# Altium PCB CMSIS-DAP_11U37_V100.PcbDoc
Units mil, origin at the board's own origin, x right, y up, seen from the top; angles counter-clockwise.
Board outline 1968.62 x 1220.51 mil, 2 copper layers (Top Layer, Bottom Layer); 29 components, 25 nets, 140 pads, 35 vias.
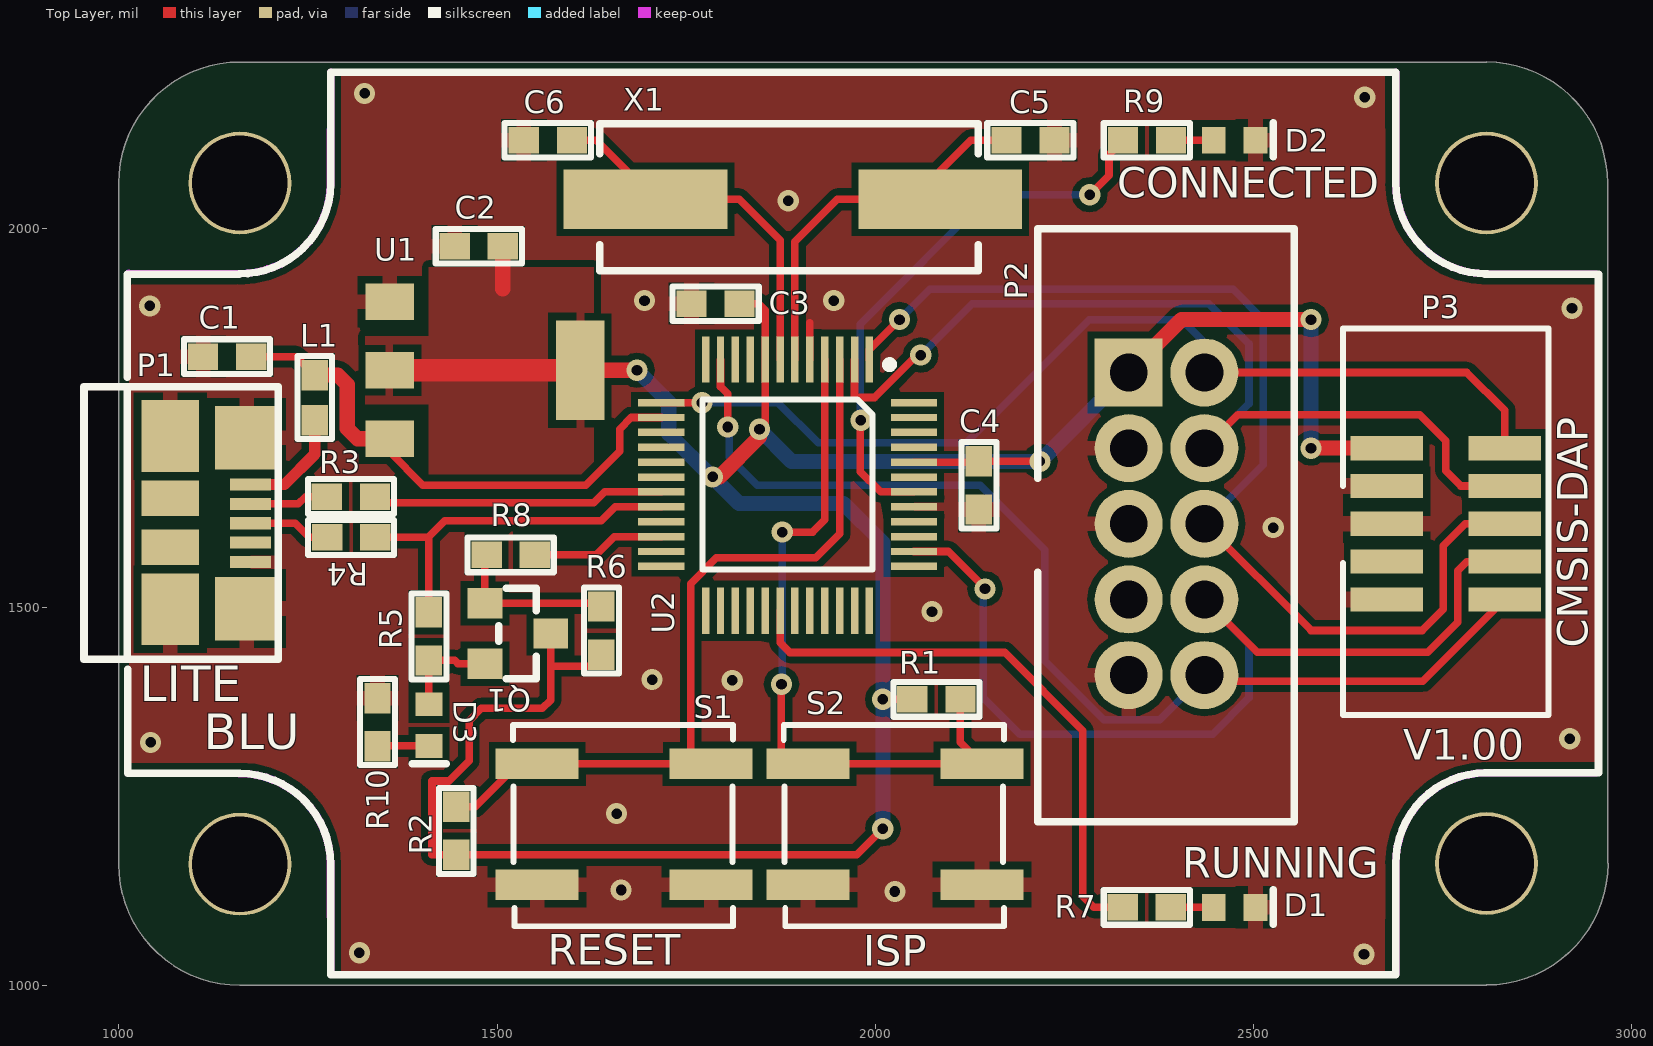
[diagram p0: Top Layer view]
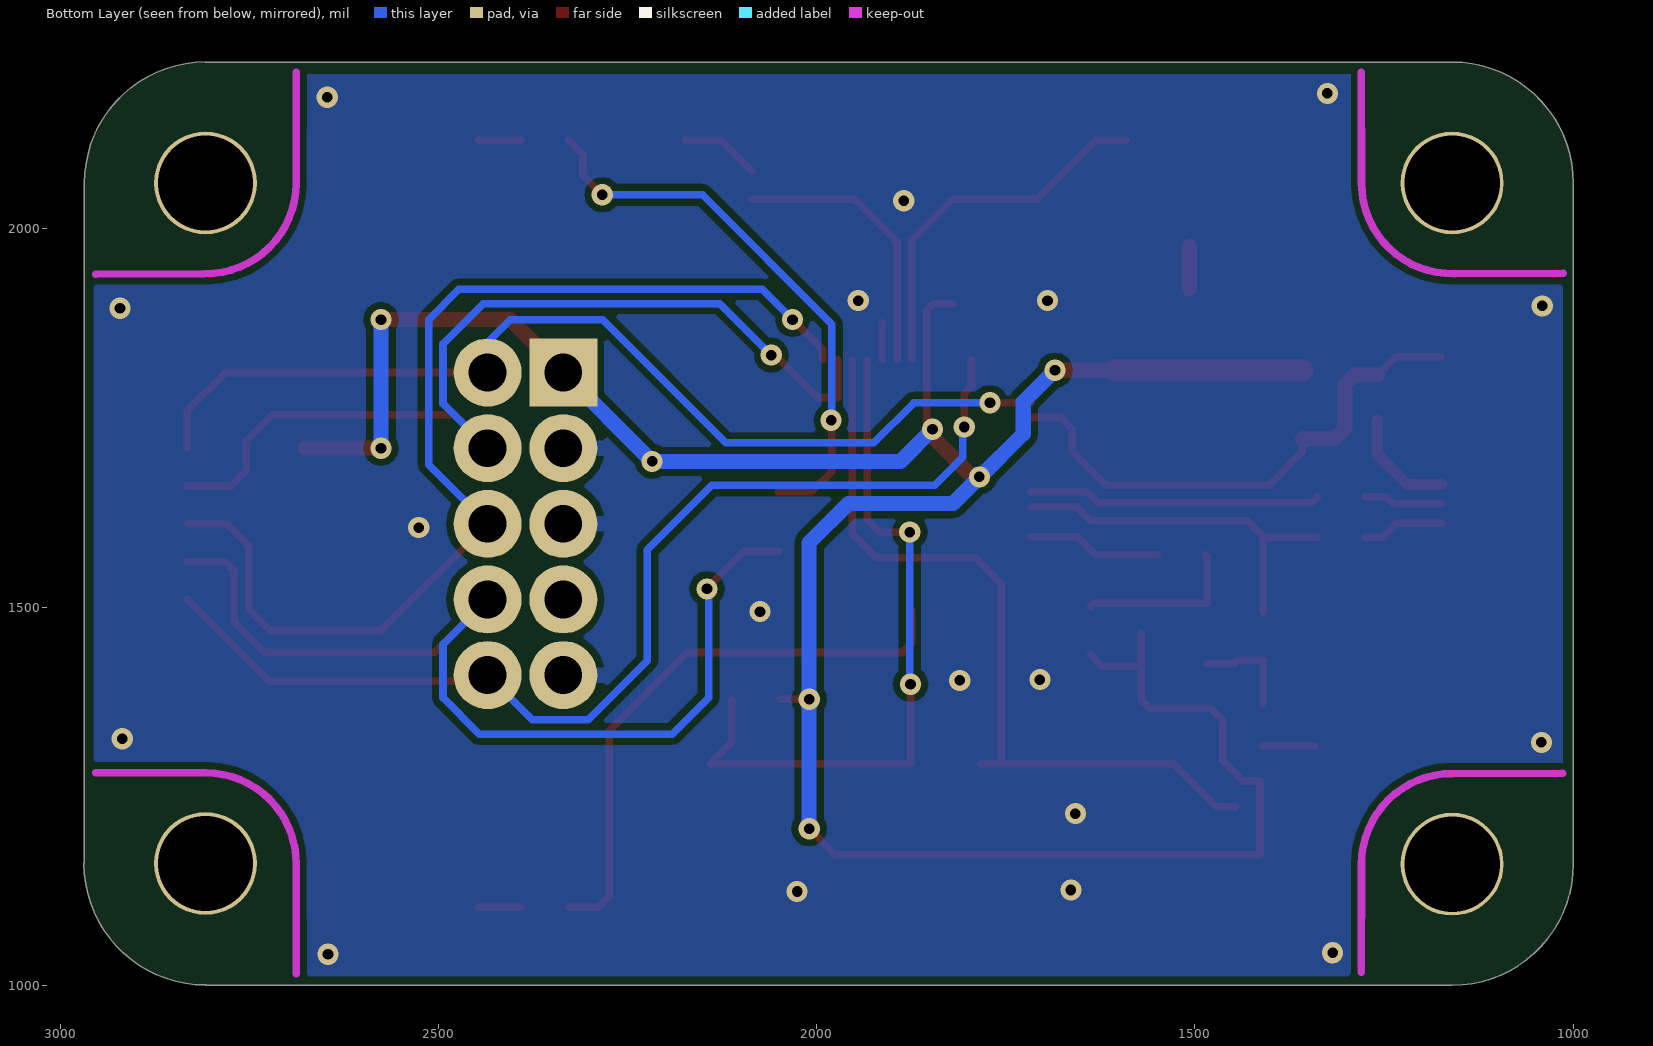
[diagram p1: Bottom Layer view, seen from below]
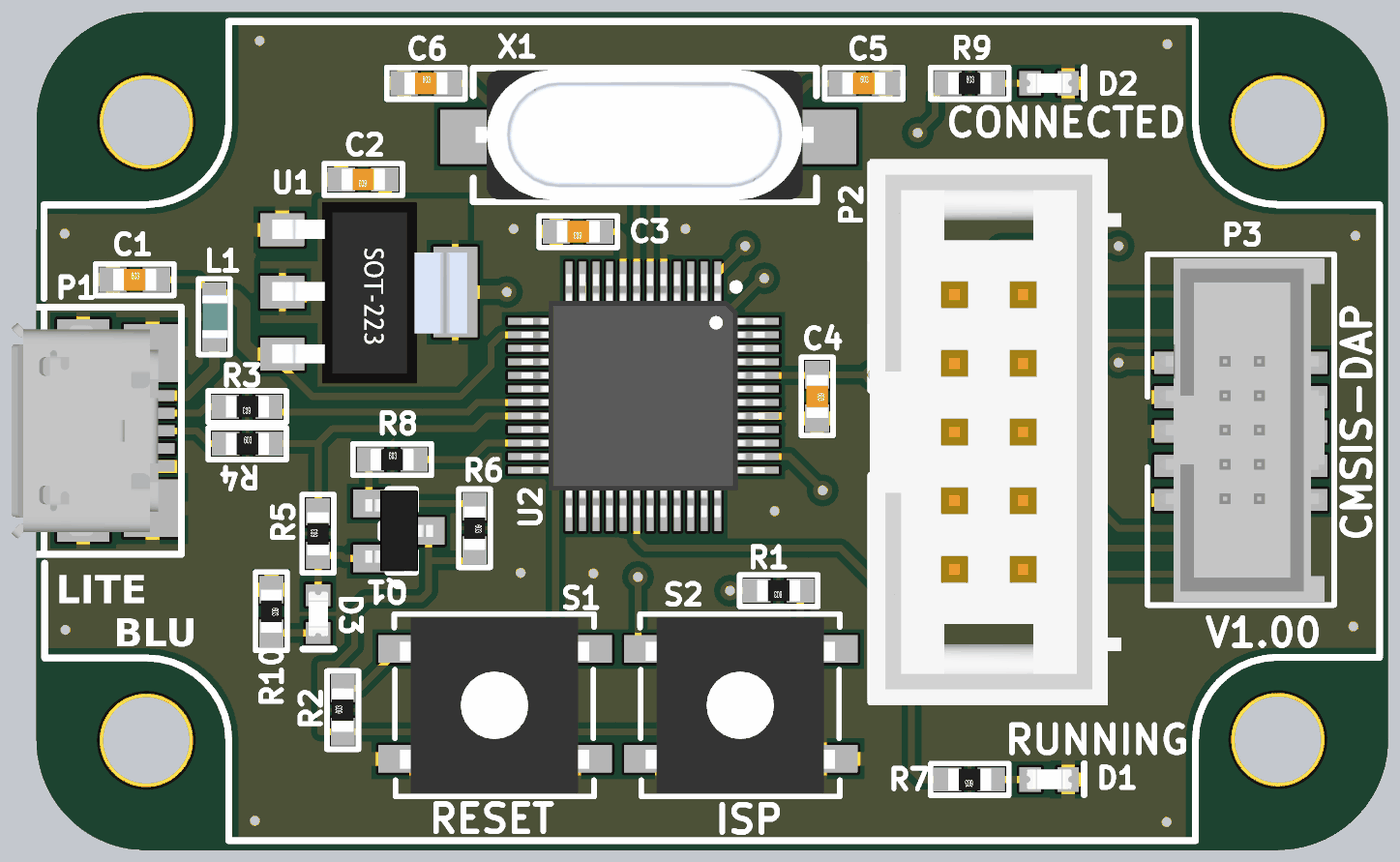
[diagram p2: 3D render of the assembled board from above, using the file's embedded part models]

## Layer stack, top to bottom
Top Layer: signal copper 1.4
Dielectric: dielectric 12.6, FR-4, Dk 4.8
Bottom Layer: signal copper 1.4

## Board outline
1160,999.99 cw(c1160,1160) 999.99,1160 1000,1160 1000,2060 cw(c1160,2060.47) 1160,2220.47 2808,2220.47 2808,2220.5 cw(c2808,2060.47) 2968.03,2060 2968.5,2060 2968.5,1161 2968.61,1161 cw(c2808,1161) 2808,1000.39 2808,1000

## Design rules (kind name [scope] priority, off if disabled: settings)
Clearance [All] p1: gap=9
HoleSize [All] p1: absolutevalues=TRUE maxlimit=200 minlimit=15 maxpercent=80.000 minpercent=20.000
PolygonConnect [All vs isVia] p1: connectstyle=Direct reliefconductorwidth=10 reliefentries=2 polygonreliefangle="45 Angle" airgapwidth=10
PolygonConnect PolygonConnect_1 [All] p2: connectstyle=Relief reliefconductorwidth=20 reliefentries=4 polygonreliefangle="90 Angle" airgapwidth=10
RoutingVias [All] p1: holewidth=15 width=30 viastyle="Through Hole" minholewidth=15 minwidth=30 maxholewidth=30 maxwidth=50
SilkscreenOverComponentPads [All] p1: minsilkscreentomaskgap=4
SolderMaskExpansion [All] p1: expansion=4
Width [All] p1: maxlimit=100 minlimit=10 preferedwidth=20
26 further rules are at their usual default settings.

## Components (designator, comment, footprint, x,y, rotation, side; value= is the part's Value field where it differs from the comment)
C1 "100n" "CAP 0603" 1112,1831 r0 top
C2 "100n" "CAP 0603" 1507,1977 r180 top
C3 "100n" "CAP 0603" 1820,1901 r180 top
C4 "100n" "CAP 0603" 2137,1692 r270 top
C5 "27p" "CAP 0603" 2174,2117 r0 top
C6 "27p" "CAP 0603" 1536,2117 r0 top
D1 "LED" "LED 0603" 2475,1103 r0 top
D2 "LED" "LED 0603" 2475,2117 r0 top
D3 "LED" "LED 0603" 1410,1344 r270 top
L1 "Ferrite Bead" "IND 0603" 1259,1805 r270 top
P1 "USB MICRO-B" "USB - MICRO-B SMD" 1174,1662 r0 top
P2 "JTAG/SWD 2.54mm" "Header IDC Box 10w 2.54mm" 2335,1810 r0 top
P3 "JTAG/SWD 1.27mm" "Header 10W /2 1.27mm Shrouded" 2676,1710 r270 top
Q1 "BC807" SOT-23 1484,1505 r270 top
R1 "10k" "RES 0603" 2112,1378 r180 top
R2 "10k" "RES 0603" 1446,1173 r90 top
R3 "33R" "RES 0603" 1338,1646 r180 top
R4 "33R" "RES 0603" 1276,1592 r0 top
R5 "1k5" "RES 0603" 1410,1430 r90 top
R6 "10k" "RES 0603" 1638,1500 r270 top
R7 "470R" "RES 0603" 2390,1103 r180 top
R8 "2k2" "RES 0603" 1487,1569 r0 top
R9 "470R" "RES 0603" 2328,2117 r0 top
R10 "470R" "RES 0603" 1342,1379 r270 top
S1 "PB" "Push Button Omron SPST" 1783,1133 r180 top
S2 "PB" "Push Button Omron SPST" 2141,1133 r180 top
U1 "{Value}" SOT-223 1610,1813 r270 top
U2 "LQFP_1" LQFP-48 1884,1662 r270 top
X1 "12MHz" "Crystal SMU4" 1891,2039 r0 top

## Footprints (in the part's own frame and the unit in brackets; to place one, negate y for a bottom-side part, rotate by r counter-clockwise, add the part's x,y. Pads: shape width x height; smd on the part's side, far side on the other; paste and mask are expansions set on the pad)
"CAP 0603" [mil] "SMD Capacitor 0603"
  rect 40x35 smd: 1(-0.56,0) 2(63,0)
  silkscreen extent -26,-23 88,23, body extent 0,-16 63,16, height 12
"Crystal SMU4" [mm] "SMU4"
  rect 5.5x2 smd: 1(-4.95,0) 2(4.95,0)
  silkscreen extent -6.48,-2.4 6.22,2.54, body extent -6.39,-2.32 6.11,2.48, height 3.92
"Header 10W /2 1.27mm Shrouded" [mil] "Header 10W /2 1.27mm Shrouded"
  rect 32x96 smd: 1(0,0) 2(0,156) 3(50,0) 4(50,156) 5(100,0) 6(100,156) 7(150,0) 8(150,156) 9(200,0) 10(200,156)
  silkscreen extent -158,-58 353,214, body extent -152,-40 348,200, height 215
"Header IDC Box 10w 2.54mm" [mil] "IDC Box Header 10w 2.54mm"
  rect 90x90 hole 50: 1(0,0)
  round 90 hole 50: 2(100,0) 3(0,-100) 4(100,-100) 5(0,-200) 6(100,-200) 7(0,-300) 8(100,-300) 9(0,-400) 10(100,-400)
  silkscreen extent -120,-594 219,190, body extent -125,-599 245,197, height 366
"IND 0603" [mil] "SMD Inductor 0603"
  rect 40x35 smd: 1(-1.56,0) 2(58,0)
  silkscreen extent -27,-23 83,23, body extent -3,-18 59,19, height 31
"LED 0603" [mm] "SMD LED 0603"
  rect 0.8x0.9 smd: 1(-0.7,0) 2(0.7,0)
  silkscreen extent 1.3,-0.56 1.3,0.58, body extent -0.83,-0.36 0.83,0.37, height 0.68
LQFP-48 [mm] "Thin QFP, 48-Leads, Body 7x7mm, Pitch 0.5mm, IPC High Density"
  rect 1.55x0.25 smd: 1(-4.191,2.75) 2(-4.191,2.25) 3(-4.191,1.75) 4(-4.191,1.25) 5(-4.191,0.75) 6(-4.191,0.25) 7(-4.191,-0.25) 8(-4.191,-0.75) 9(-4.191,-1.25) 10(-4.191,-1.75) 11(-4.191,-2.25) 12(-4.191,-2.75) 25(4.242,-2.75) 26(4.242,-2.25) 27(4.242,-1.75) 28(4.242,-1.25) 29(4.242,-0.75) 30(4.242,-0.25) 31(4.242,0.25) 32(4.242,0.75) 33(4.242,1.25) 34(4.242,1.75) 35(4.242,2.25) 36(4.242,2.75)
  rect 0.25x1.55 smd: 13(-2.75,-4.242) 14(-2.25,-4.242) 15(-1.75,-4.242) 16(-1.25,-4.242) 17(-0.75,-4.242) 18(-0.25,-4.242) 19(0.25,-4.242) 20(0.75,-4.242) 21(1.25,-4.242) 22(1.75,-4.242) 23(2.25,-4.242) 24(2.75,-4.242) 37(2.75,4.242) 38(2.25,4.242) 39(1.75,4.242) 40(1.25,4.242) 41(0.75,4.242) 42(0.25,4.242) 43(-0.25,4.242) 44(-0.75,4.242) 45(-1.25,4.242) 46(-1.75,4.242) 47(-2.25,4.242) 48(-2.75,4.242)
  silkscreen extent -4.15,-2.85 2.85,3.55, body extent -4.5,-4.51 4.5,4.49, height 1.56
"Push Button Omron SPST" [mil]
  rect 110x40 smd: 1(0,0) 1(230,0) 2(0,-160) 2(230,-160)
  silkscreen extent -29,-211 262,55, body extent -22,-206 254,50, height 134
"RES 0603" [mil] "SMD Resistor 0603"
  rect 40x35 smd: 1(-0.56,0) 2(63,0)
  silkscreen extent -26,-23 88,23, body extent 0,-16 63,16, height 12
SOT-23 [mil]
  rect 40x46 smd: 1(0,0) 2(80,0) 3(40,87)
  silkscreen extent -20,18 100,68, body extent -19,-5 99,93, height 42
SOT-223 [mil]
  rect 48x64 smd: 1(-90.55,-252) 2(0,-252) 3(90.55,-252)
  rect 132x64 smd: 2(0,0)
  body extent -131,-267 133,17, height 73
"USB - MICRO-B SMD" [mil] "USB MICRO-B Molex (702-5475)"
  rect 54x16 smd: 1(0,0) 2(0,-25.59) 3(0,-51.18) 4(0,-76.77) 5(0,-102.36)
  rect 76x95 smd: 6(-106,-165) 6(-106,64)
  rect 84x84 smd: 6(-5,-164) 6(-5,62)
  rect 76x47 smd: 7(-106,-83) 7(-106,-18)
  silkscreen extent -220,-231 37,129, body extent -210,-208 3,106, height 108

## Part data
C1 C2 C3 C4 C5 C6: library part "Capacitor Ceramic", "Capacitor Ceramic"
L1: library part Inductor, "Inductor"
P2 P3: library part "CONN - 10W JTAG/SWD", "CONN - 10W JTAG/SWD"
Q1: library part "Transistor PNP", "PNP Bipolar Transistor"
R1 R2 R3 R4 R5 R6 R7 R8 R9 R10: library part Resistor, "Resistor"
S1 S2: library part "Push Button SPST"
U1: library part "Regulator Positive", "Regulator Positive"
U2: library part LPC11Uxx-48, "32-bit ARM Cortex-M0 microcontroller; up to 128 kB flash; up  to 12 kB SRAM and 4 kB EEPROM; USB device; USART"
X1: library part Crystal

## Free pads (board coordinates)
  round 136 hole 126: 0(1160,1160) 0(1160,2060.47) 0(2808,1161) 0(2808,2060.47)

## Via types
v1: diameter 28, hole 14, Top Layer to Bottom Layer, tented both sides, 35 vias

## Nets (pads, with @x,y where several pads share a name; then routed paths per layer and width w, separated by ;. In a path a pad name is that pad's centre, name@x,y a point inside that pad or via, vN(x,y) a via of type N, cw(c..) or ccw(c..) an arc to the next point about the centre after c; other vN are vias at no path point)
3V3: C2.1 C3.1 C4.1 P2.1 P3.1 Q1.3 R1.2 R2.1 R6.2 U1.2 U2.8 U2.44 | length 3935.5
  Top Layer w10: R6.2 1623,1422 1571,1422 Q1.3 1571,1377 1560,1366 1479,1366 1463,1350 1463,1297 1436,1270 1414,1270 1414,1172.44 R2.1 1975.44,1172.44 v1(2010,1207) ; C3.1 1846,1901 1854.47,1892.53 U2.8 1854.47,1742.47 v1(1847,1735) ; v1(2010,1378) R1.2 ; U2.44 2135.97,1691.53 C4.1 v1(2217.56,1692.56)
  Top Layer w20: 1507.56,1920.56 C2.1 ; U1.2@1610,1813 v1(1685,1813) ; v1(1785,1672) 1794,1672 1847,1725 v1@1847,1733.33 ; P2.1 2405,1880 v1(2576,1880) ; v1(2576,1710) P3.1
  Top Layer w30: U1.2@1358,1813 U1.2@1605,1813
  Bottom Layer w20: v1(1685,1813) 1727,1771 1727,1729 1784,1672 v1(1785,1672) 1820,1637 1958,1637 2010,1585 v1(2010,1378) v1(2010,1207) ; v1(1847,1735) 1889.44,1692.56 v1(2217.56,1692.56) P2.1 ; v1(2576,1710) v1(2576,1880)
GND: C1.1 C2.2 C3.2 C4.2 C5.2 C6.1 D1.2 D2.2 P1.5 P1.6 P2.3 P2.5 P2.9 P3.3 P3.5 P3.9 R10.1 S1.1 S2.1 U1.1 U2.5 U2.41 | length 48.5
  Top Layer w10: U2.5 1913.53,1875.53
  other v1: 2646,1041 1318,1043 2026,1124 1664,1126 1658,1227 1042,1321 2918,1326 1811,1403 1705,1404 2075,1494 2526,1605 2921,1895 1041,1898 1695,1905 1945,1905 1885,2037 2647,2174 1325,2179
NetC5_1: C5.1 U2.6 X1.2 | length 475.3
  Top Layer w10: U2.6 1893.84,1982.84 1950,2039 X1.2 ; X1.2@2085.88,2076.88 2126,2117 C5.1
NetC6_2: C6.2 U2.7 X1.1 | length 495.7
  Top Layer w10: C6.2@1591,2117 1631,2117 1709,2039 1820,2039 1874.16,1984.84 U2.7
NetD1_1: D1.1 R7.1 | length 56.9
  Top Layer w10: R7.1 D1.1
NetD2_1: D2.1 R9.2 | length 56.4
  Top Layer w10: R9.2 D2.1
NetD3_1: D3.1 Q1.2 R5.1 | length 133.7
  Top Layer w10: D3.1 R5.1 1444,1429.44 1448.44,1425 Q1.2
NetD3_2: D3.2 R10.2 | length 68.2
  Top Layer w10: R10.2 1342.44,1316.44 D3.2
NetL1_2: L1.2 P1.1 | length 146.6
  Top Layer w15: P1.1 1219,1662 1259,1702 L1.2
NetP1_2: P1.2 R3.2 | length 105
  Top Layer w10: P1.2 1237.41,1636.41 1247,1646 R3.2
NetP1_3: P1.3 R4.1 | length 109.2
  Top Layer w10: P1.3 1233.18,1610.82 1252,1592 R4.1
NetQ1_1: Q1.1 R6.1 R8.1 | length 220.9
  Top Layer w10: R8.1 1484,1566.56 Q1.1 1633.56,1505 R6.1
NetR1_1: R1.1 S2.2 U2.4 | length 941.5
  Top Layer w10: v1(1876,1398) 1876,1293 1911,1293 2141,1293 2112.56,1321.44 R1.1 ; v1(1877,1599) 1917,1599 1933.21,1615.21 U2.4
  Bottom Layer w10: v1@1877,1399 v1(1877,1599)
NetR3_1: R3.1 U2.19 | length 387.6
  Top Layer w10: R3.1 1346.56,1638 1628,1638 1642.16,1652.16 U2.19
NetR4_2: R4.2 R5.2 U2.20 | length 564.8
  Top Layer w10: R5.2 1410,1592 R4.2 1409,1592 1431,1614 1638,1614 1656.47,1632.47 U2.20
NetR7_2: R7.2 U2.30 | length 768.2
  Top Layer w10: U2.30 1874.16,1452.84 1887.06,1439.94 2171.06,1439.94 2274.5,1336.5 2274.5,1117.5 2289,1103 R7.2
NetR9_1: R9.1 U2.42 | length 758
  Top Layer w10: v1@1980,1747 v1(1981,1747) ; v1@1980,1751 1982,1753 1981,1753 1980,1752 1980,1679.16 2007,1652.16 U2.42 ; v1(2283.44,2045) 2309,2070.56 2309,2098.56 R9.1
  Bottom Layer w10: v1(1981,1747) 1980,1747 1980,1751 1982,1753 1981,1753 1980,1752 1980,1874 2151,2045 v1(2283.44,2045)
NRESET: R2.2 S1.2 U2.3 | length 1052.9
  Top Layer w10: R2.2 1471,1236 1528,1293 1553,1293 S1.2@1756,1293 ; S1.2@1783,1293 S1.2@1756,1293 ; U2.3 1952.9,1596.9 1921,1565 1790,1565 1756,1531 S1.2@1756,1293
NRST: P2.10 P3.10 U2.11 | length 1474.2
  Top Layer w10: U2.11 1795.42,1791.45 1804.38,1782.49 1804.51,1782.49 1804.51,1782.35 1805,1781.87 v1(1805,1738) ; P2.10 P2.10@2459,1386 ; P2.10@2452,1402 2724,1402 P3.10
  Bottom Layer w10: v1@1807,1738 1807,1697.74 1843.74,1661 2139,1661 2224,1576 2224,1429 2302,1351 2376,1351 P2.10
TCK: P2.4 P3.4 U2.2 | length 1284.8
  Top Layer w10: U2.2 1972.58,1777 1999,1777 2055,1833 v1(2060,1833) ; P2.4 2479,1754 2720,1754 2754,1720 2754,1680 2774,1660 P3.4
  Bottom Layer w10: v1(2060,1833) 2128,1901 2441,1901 2494,1848 2494,1769 P2.4
TDI: P2.8 P3.8 U2.38 | length 1320.2
  Top Layer w10: U2.38 2096.58,1573.42 v1@2146,1524 ; P2.8 2505,1440 2730,1440 2770,1480 2770,1548 2782,1560 P3.8
  Bottom Layer w10: v1@2143,1524 2143,1380 2191,1332 2446,1332 2494,1380 2494,1451 P2.8
  other v1: 2145,1524
TDO: P2.6 P3.6 U2.1 | length 1448.9
  Top Layer w10: U2.1 1992.27,1840.27 v1(2032,1880) ; P2.6 2576,1469 2723,1469 2751,1497 2751,1581 2780,1610 P3.6
  Bottom Layer w10: v1(2032,1880) 2072,1920 2473,1920 2513,1880 2513,1688 P2.6
TMS: P2.2 P3.2 U2.13 | length 1339.9
  Top Layer w10: U2.13 1777,1770.27 1776.73,1770 v1(1771,1770) ; P2.2 2782,1810 2832,1760 P3.2
  Bottom Layer w10: v1(1771,1770) 1771.27,1770.27 1871.38,1770.27 1924.65,1717 2120,1717 2283,1880 2405,1880 2435,1850 P2.2
USB_VBUS: C1.2 L1.1 U1.3 U2.14 | length 710.7
  Top Layer w10: C1.2 1234.56,1831 L1.1 ; U1.3 1358,1705 1402,1661 1617,1661 1662,1706 1662,1735 1677.58,1750.58 U2.14
  Top Layer w20: L1.1 1289.44,1806.56 1302,1794 1302,1736 1315.55,1722.45 U1.3
USBCON: R8.2 U2.22 | length 177
  Top Layer w10: R8.2 1631,1569 1655.1,1593.1 U2.22
pads on no net: P1.4 P1.7 P2.7 P3.7 U2.9 U2.10 U2.12 U2.15 U2.16 U2.17 U2.18 U2.21 U2.23 U2.24 U2.25 U2.26 U2.27 U2.28 U2.29 U2.31 U2.32 U2.33 U2.34 U2.35 U2.36 U2.37 U2.39 U2.40 U2.43 U2.45 U2.46 U2.47 U2.48

## Polygon pours and split planes (outlines as drawn)
3V3 on Top Layer "Toplayer-3v3" (solid, pour order 5): 1326,1858 1326,1768 1410,1768 1410,1675 1628,1675 1628,1949 1410,1949 1410,1858
GND on Top Layer "Bottom Layer-No Net" (solid, remove dead copper, pour order 3): 1013,1939.85 1157.1,1939.85 1157.47,1939.47 1281,2063 1281,2063.85 1281,2204.85 1280,2205.85 2688,2205.85 2688,2058.96 2688.13,2058.83 2807.51,1939.45 2808.86,1939.45 2952.4,1939.45 2953,1938.85 2956,1938.85 2956,1279.85 2955.87,1279.72 2808,1279.72 2808,1278.82 2688.13,1158.95 2688,1158.82 2688,1013.85 1282,1013.85 1280,1015.85 1279.87,1015.98 1279.87,1158.85 1278.85,1158.85 1158.98,1278.72 1158.85,1278.85 1014,1278.85 1014,1938.85 1013,1939.85
GND on Bottom Layer "Bottom Layer-No Net" (solid, pour order 3): 1013,1938 1157.1,1938 1157.47,1937.63 1281,2061.15 1281,2062 1281,2203 1280,2204 2688,2204 2688,2057.11 2688.13,2056.98 2807.51,1937.6 2808.86,1937.6 2952.4,1937.6 2953,1937 2956,1937 2956,1278 2955.87,1277.87 2808,1277.87 2808,1276.97 2688.13,1157.11 2688,1156.97 2688,1012 1282,1012 1280,1014 1279.87,1014.13 1279.87,1157 1278.85,1157 1158.98,1276.87 1158.85,1277 1014,1277 1014,1937 1013,1938

## Keep-outs
Keep-Out Layer:
  rectangle: 1195,1946 1205,1951
  rectangle: 1175,1942 1183,1943
  lines w10: 1013,1941 1157.47,1940.63 ccw(c1160,2060.47) 1279.86,2059.05 1280,2207 ; 1014,1280 1158.98,1279.87 cw(c1160,1160) 1279.87,1160 1280,1017 ; 2688,1015 2688.13,1160.11 cw(c2808,1161) 2808,1280.87 2953,1281 ; 2688,2207 2688.13,2059.98 ccw(c2808,2060.47) 2808.86,1940.6 2953,1940

## Silkscreen, mask and mechanical layers (free items; w line width, h text height)
Top Overlay:
  lines w10: 1011,1804 1011,1940 1159,1940 ; 1012,1418 1012,1280.01 1160,1280.01 cw(c1160,1160) 1280.01,1160 ; 1159,1940.47 ccw(c1160,2060.47) 1280,2059 1280,2207 2688,2207 2688,2061 ccw(c2808,2060.47) 2808.98,1940.47 ; 1280,1161 1280,1014 2688,1014 2688,1161 ; 2687.99,1160.17 cw(c2808,1161) 2807.08,1281.01 ; 2806,1281 2956,1281 2956,1940 2806,1940
  text "CONNECTED" at 2320,2041 h40
  text "CMSIS-DAP" at 2942,1446 h40 r90
  text "LITE" at 1028,1360 h80
  text "V1.00" at 2698,1298 h40
  text "BLU" at 1112,1297 h80
  text "RUNNING" at 2406,1142 h40
  text "RESET" at 1567,1027 h40
  text "ISP" at 1984,1026 h40
Mechanical 1:
  lines w10: 2808,1000 1160,1000 cw(c1160,1160) 999.99,1160 1000,2060 cw(c1160,2060.47) 1160,2220.47 2808,2220.47 ; 2808,1000.39 ccw(c2808,1161) 2968.61,1161 ; 2808,2220.5 cw(c2808,2060.47) 2968.03,2060 ; 2968.5,1161 2968.5,2060